# Altium PCB Buck_Boost.PcbDoc
Units mil, origin at the board's own origin, x right, y up, seen from the top; angles counter-clockwise.
Board outline 1375 x 605 mil, 2 copper layers (Top Layer, Bottom Layer); 9 components, 8 nets, 26 pads, 0 vias.
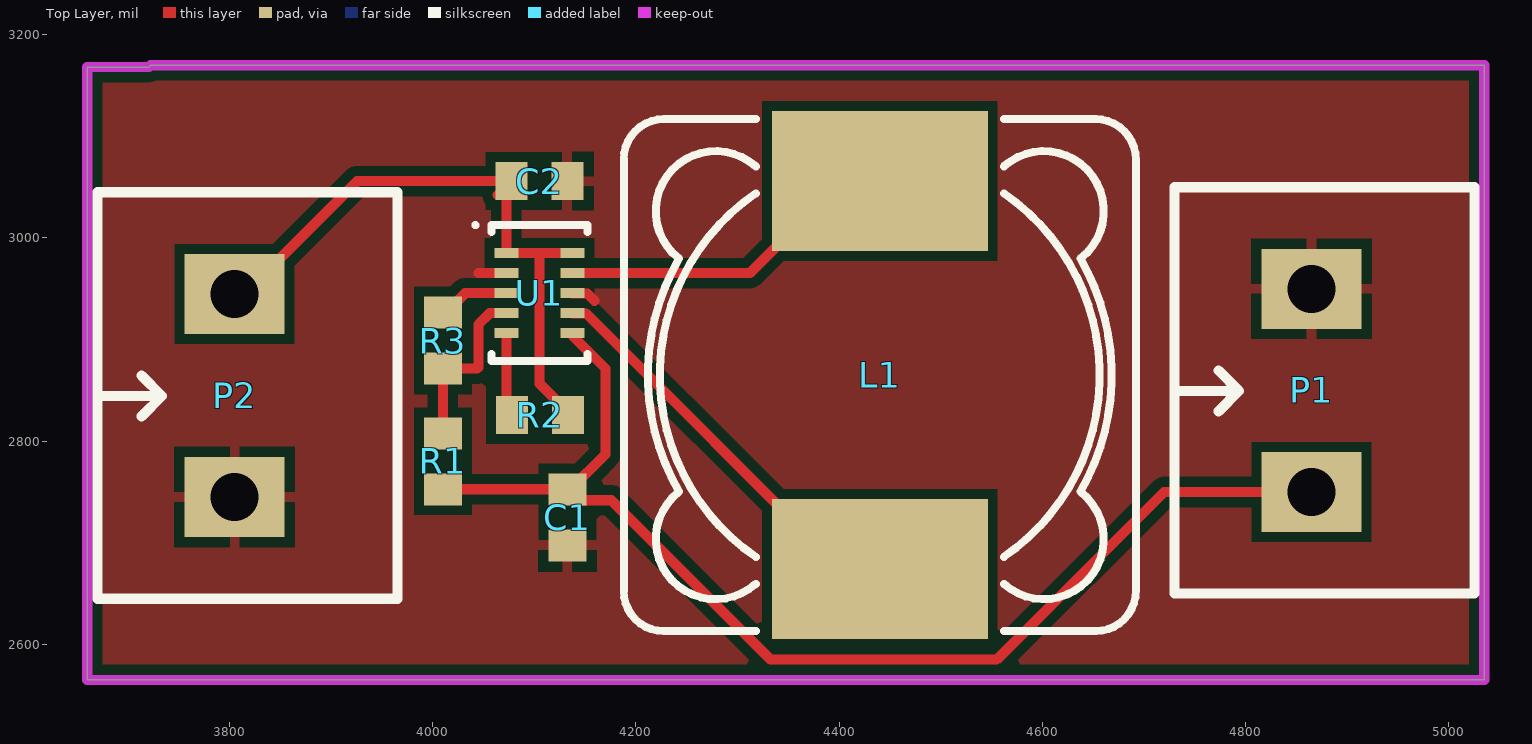
[diagram p0: Top Layer view]
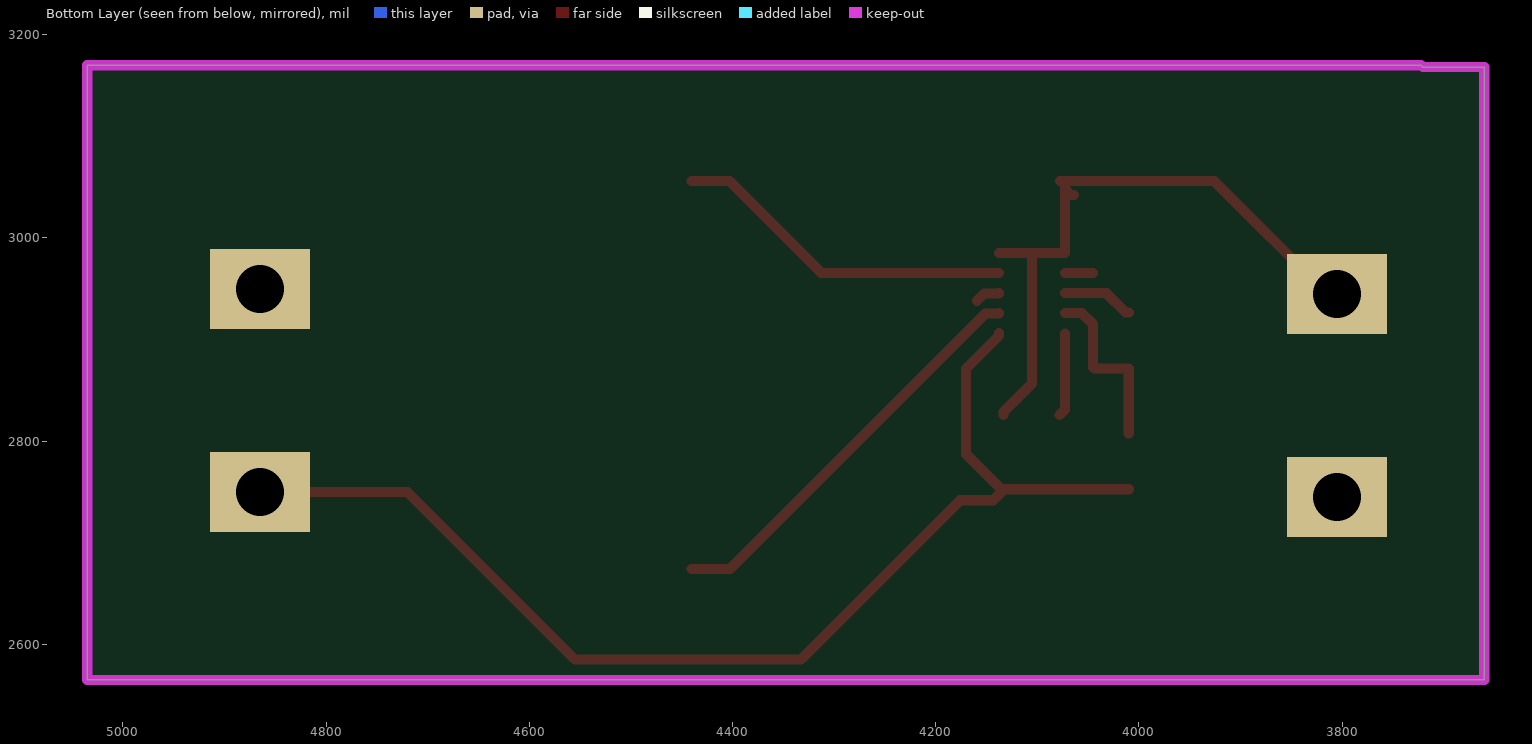
[diagram p1: Bottom Layer view, seen from below]
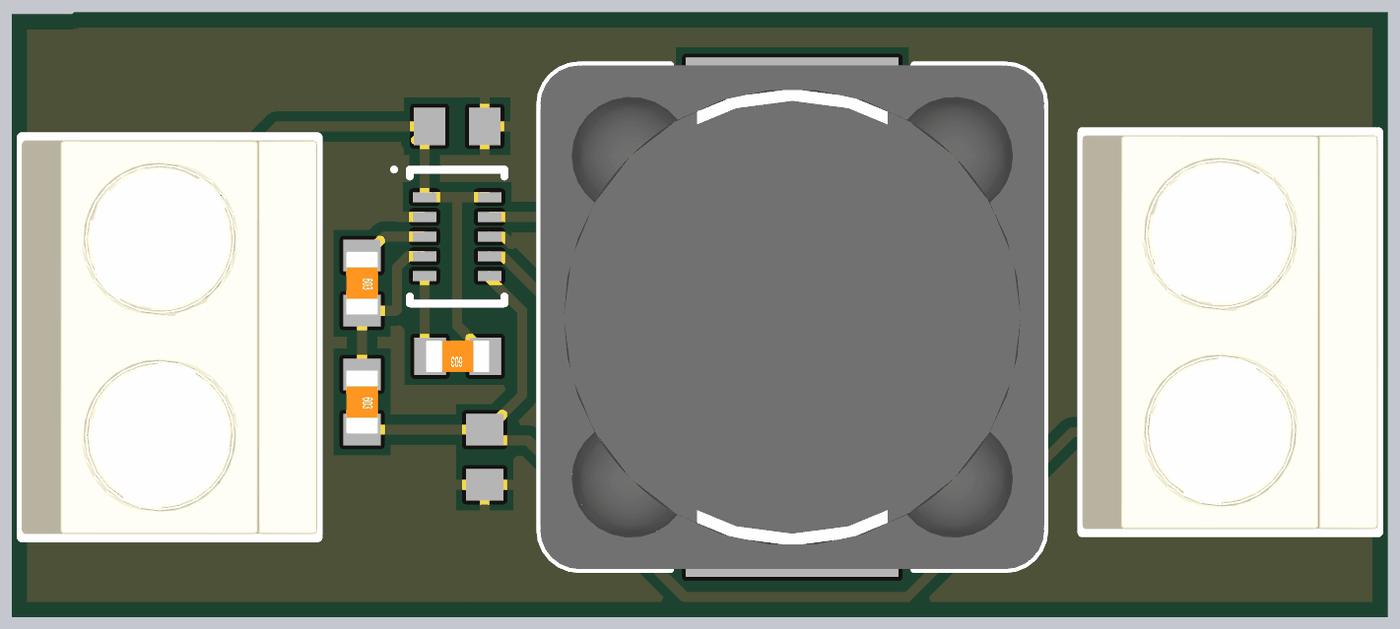
[diagram p2: 3D render of the assembled board from above, using the file's embedded part models]

## Layer stack, top to bottom
Top Solder: solder mask 0.4, Solder Resist, Dk 3.5
Top Layer: signal copper 1.4
Dielectric 1: dielectric 12.6, FR-4, Dk 4.8
Bottom Layer: signal copper 1.4
Bottom Solder: solder mask 0.4, Solder Resist, Dk 3.5

## Board outline
3660,2565 3660,3168.27 3720.46,3168.27 3722.19,3170 5035,3170 5035,2565

## Design rules (kind name [scope] priority, off if disabled: settings)
Clearance [All] p1: gap=10 ignorepadtopadclearanceinfootprint=FALSE except(0: Arc-Hole Track-Hole SMDPad-Hole THPad-Hole Via-Hole Fill-Hole Poly-Hole Region-Hole Text-Hole)
PolygonConnect [All] p1: connectstyle=Relief reliefconductorwidth=10 reliefentries=4 polygonreliefangle="90 Angle" airgapwidth=10
RoutingVias [All] p1: holewidth=28 width=50 viastyle="Through Hole" minholewidth=28 minwidth=50 maxholewidth=28 maxwidth=50
SolderMaskExpansion [All] p1: expansion=4
Width [All] p1: maxlimit=10 minlimit=10 preferedwidth=10
30 further rules are at their usual default settings.

## Components (designator, comment, footprint, x,y, rotation, side; value= is the part's Value field where it differs from the comment)
C1 "Cap Non-Pol SMD" CAP-SM-0603 4132.56,2725 r270 top value=22uF
C2 "Cap Non-Pol SMD" CAP-SM-0603 4105,3055.94 r0 top value=10uF
L1 "Inductor" "INDUCTOR 12.5x12.5" 4440,2865 r90 top value=0.47uH
P1 "Domino 2" "DOMINO 2- 5mm" 4865,2850 r90 top
P2 "Domino 2" "DOMINO 2- 5mm" 3805,2845 r90 top
R1 "RESISTOR SMD" RES-SM-0603 4010,2807.23 r270 top value=511K
R2 "RESISTOR SMD" RES-SM-0603 4132.56,2825.93 r180 top value=100K
R3 "RESISTOR SMD" RES-SM-0603 4010,2926.06 r270 top value=91K
U1 "TPS63802" TPS63802 4105,2945.75 r0 top

## Footprints (in the part's own frame and the unit in brackets; to place one, negate y for a bottom-side part, rotate by r counter-clockwise, add the part's x,y. Pads: shape width x height; smd on the part's side, far side on the other; paste and mask are expansions set on the pad)
CAP-SM-0603 [mm] "SMD Ceramic Capacitor Size 0603"
  rect 0.8x0.95 smd: 1(-0.7,0) 2(0.7,0)
  body extent -0.85,-0.45 0.85,0.45, height 0.6
"DOMINO 2- 5mm" [mm]
  rect 2x2.5 hole 1.2: 1(-2.54,0) 2(2.54,0)
  silkscreen extent -5.08,-4.08 5.08,3.43, body extent -5,-4.07 5,3.43, height 10
"INDUCTOR 12.5x12.5" [mm] "SMD Inductor  Body Width 12.5mm Body Lenght 12.5mm Height 8mm"
  rect 3.5x5.4 smd: 1(-4.85,0) 2(4.85,0)
  silkscreen extent -6.4,-6.4 6.4,6.4, body extent -6.4,-6.4 6.4,6.4, height 8
RES-SM-0603 [mm]
  rect 0.8x0.95 smd: 1(-0.014,0) 2(1.386,0)
  body extent -0.11,-0.4 1.49,0.4, height 0.3
TPS63802 [mm] "SON, 10-Leads, Body 3,00x2,00mm, Pitch 0,50mm, IPC Medium Density"
  rect 0.6x0.25 smd: 1(-0.825,1) 2(-0.825,0.5) 3(-0.825,0) 4(-0.825,-0.5) 5(-0.825,-1) 6(0.825,-1) 7(0.825,-0.5) 8(0.825,0) 9(0.825,0.5) 10(0.825,1)
  silkscreen extent -1.65,-1.7 1.2,1.75, body extent -1.05,-1.55 1.05,1.55, height 1

## Part data
C1 C2: "Capacitor"
P1 P2: "Domino, 2-Pin", LatestRevisionDate=17-Jul-2002, LatestRevisionNote="Re-released for DXP Platform.", Publisher="Altium Limited"
R1 R2 R3: "Resistor"
U1: "SMD"

## Nets (pads, with @x,y where several pads share a name; then routed paths per layer and width w, separated by ;. In a path a pad name is that pad's centre, name@x,y a point inside that pad or via, vN(x,y) a via of type N, cw(c..) or ccw(c..) an arc to the next point about the centre after c; other vN are vias at no path point)
GND: C1.2 C2.2 P1.2 P2.1 U1.2 U1.8 | length 52.5
  Top Layer w10: 4045,2965.43 U1.2 ; U1.8 4137.8,2945.43 4152.07,2945.43 4159.29,2938.21
NetC1_1: C1.1 P1.1 R1.2 U1.6 | length 1177.3
  Top Layer w10: R1.2 4132.45,2752.67 C1.1 ; U1.6 4137.56,2906.3 4137.56,2903.95 4170,2871.5 4170,2787.05 4135.51,2752.56 C1.1 ; P1.1 4720,2750 4555,2585 4332.65,2585 4175.83,2741.81 4143.31,2741.81 C1.1
NetC2_1: C2.1 P2.2 R2.1 U1.1 U1.10 | length 631.3
  Top Layer w10: P2.2 3814.84,2945 3925.79,3055.94 C2.1 ; C2.1@4063.74,3042.24 4066.69,3042.24 C2.1@4072.52,3048.07 ; C2.1@4072.52,3051.02 C2.1@4072.52,3048.07 ; R2.1 4133.12,2828.88 4105,2857 4105,2985.12 ; U1.10 4105,2985.12 ; C2.1@4072.52,3048.07 U1.1 4105,2985.12
NetL1_1: L1.1 U1.7 | length 406.9
  Top Layer w10: U1.7 4137.72,2925.83 4150.83,2925.83 4402.6,2674.06 L1.1
NetL1_2: L1.2 U1.9 | length 340
  Top Layer w10: U1.9 4312.09,2965.43 4402.6,3055.94 L1.2
NetR1_1: R1.1 R3.2 U1.4 | length 173.6
  Top Layer w10: R1.1 R3.2 4043.7,2871.5 4045,2872.8 4045,2915 4056.06,2926.06 U1.4
NetR2_2: R2.2 U1.5 | length 82.4
  Top Layer w10: U1.5@4072.52,2906.06 4072.52,2831.41 R2.2
NetR3_1: R3.1 U1.3 | length 70.4
  Top Layer w10: R3.1 4012.95,2926.62 4032.08,2945.75 U1.3

## Polygon pours and split planes (outlines as drawn)
GND on Top Layer "Top Layer-No Net" (solid, pour order 6): 3660,2565 3660,3168.27 3720.46,3168.27 3722.19,3170 5035,3170 5035,2565

## Keep-outs
Keep-Out Layer:
  lines w10: 3660,2565 3660,3168.27 3720.46,3168.27 3722.19,3170 4198.12,3170 4757.71,3170 5035,3170 5035,3155 5035,2565 3660,2565